# EAGLE board hammingparity (EAGLE 7.6.0)

Size 73.58 x 76.09 mm. Coordinates in mm from the lower left corner, seen from the top.
Outline: 0,0 56.82,0 56.82,53.33 0,53.33 0,0
Copper layers (1*16): Top 0.035mm / dielectric 1.5mm / Bottom 0.035mm
Design rules "default": minimum track width 10mil, minimum drill 24mil, track to track 8mil, track to pad 8mil, pad to pad 8mil, via to via 8mil, smd to smd 8mil, copper to edge 40mil, drill to drill 8mil, minimum pad ring 10mil, minimum via ring 8mil, stop-mask expansion 4mil, vias tented up to drill 0mil, thermal gap 10mil

## Footprints (pad centres in the part's own frame; a part is rotated, then mirrored left to right if it is on the bottom)
LED5MM = drill 0.813 octagon: A -1.27,0; K 1.27,0
0207/10 = drill 0.813 octagon: 1 -5.08,0; 2 5.08,0
TL1105 = drill 1 pad 1.676: 1 -2.25,3.25; 2 2.25,3.25; 3 -2.25,-3.25; 4 2.25,-3.25
ARDUINO_UNO = drill 1.016 pad 1.88: 0 63.5,50.8; 1 60.96,50.8; 2 58.42,50.8; 3 55.88,50.8; 3.3V 35.56,2.54; 4 53.34,50.8; 5 50.8,50.8; 5V 38.1,2.54; 6 48.26,50.8; 7 45.72,50.8; 8 41.656,50.8; 9 39.116,50.8; 10 36.576,50.8; 11 34.036,50.8; 12 31.496,50.8; 13 28.956,50.8; A0 50.8,2.54; A1 53.34,2.54; A2 55.88,2.54; A3 58.42,2.54; A4 60.96,2.54; A5 63.5,2.54; AREF 23.876,50.8; GND 26.416,50.8; GND. 43.18,2.54; GND.. 40.64,2.54; I/OREF 30.48,2.54; N/C 27.94,2.54; RESET 33.02,2.54; SCL 18.796,50.8; SDA 21.336,50.8; VIN 45.72,2.54 | hole 3.2: 66.04,7.62; 66.04,35.56; 15.24,50.8; 13.97,2.54
1X16P-2.54-2.54-11.6-3.0-BLACK-MALE = drill 0.889 pad 1.651 square: 1 0,19.05 | drill 0.889 pad 1.651: 2 0,16.51; 3 0,13.97; 4 0,11.43; 5 0,8.89; 6 0,6.35; 7 0,3.81; 8 0,1.27; 9 0,-1.27; 10 0,-3.81; 11 0,-6.35; 12 0,-8.89; 13 0,-11.43; 14 0,-13.97; 15 0,-16.51; 16 0,-19.05

## Placement (x,y rotation side)
DD3  [LED5MM]  5,187.88 0 top  (outside the outline)
DD5  [LED5MM]  5,238.68 0 top  (outside the outline)
DD6  [LED5MM]  5,264.08 0 top  (outside the outline)
DD7  [LED5MM]  5,289.48 0 top  (outside the outline)
DP1  [LED5MM]  5,314.88 0 top  (outside the outline)
DP2  [LED5MM]  5,162.48 0 top  (outside the outline)
DP4  [LED5MM]  5,213.28 0 top  (outside the outline)
R1  0.33k‎Ω  [0207/10]  5,10.08 0 top
R2  620‎Ω  [0207/10]  5,35.48 0 top
R3  1k‎Ω  [0207/10]  5,48.18 0 top
R4  3.3k‎Ω  [0207/10]  5,340.28 0 top  (outside the outline)
R5  2k‎Ω  [0207/10]  5,60.88 0 top
R6  0.22k‎Ω  [0207/10]  5,137.08 0 top  (outside the outline)
R7  330‎Ω  [0207/10]  5,149.78 0 top  (outside the outline)
R8  1k‎Ω  [0207/10]  5,175.18 0 top  (outside the outline)
R9  1k‎Ω  [0207/10]  5,200.58 0 top  (outside the outline)
R10  1k‎Ω  [0207/10]  5,225.98 0 top  (outside the outline)
R11  1k‎Ω  [0207/10]  5,251.38 0 top  (outside the outline)
R12  1k‎Ω  [0207/10]  5,276.78 0 top  (outside the outline)
R13  1k‎Ω  [0207/10]  5,302.18 0 top  (outside the outline)
SDOWN  [TL1105]  5,98.98 0 top  (outside the outline)
SLEFT  [TL1105]  5,111.68 0 top  (outside the outline)
SRIGHT  [TL1105]  5,73.58 0 top
SSELECT  [TL1105]  5,327.58 0 top  (outside the outline)
SUP  [TL1105]  5,86.28 0 top  (outside the outline)
U1  [ARDUINO_UNO]  5,22.78 0 top
U2  [1X16P-2.54-2.54-11.6-3.0-BLACK-MALE]  5,124.38 0 top  (outside the outline)

## Library data of the parts
DD3 DD5-DD7 DP1 DP2 DP4 R1-R13 SDOWN SLEFT SRIGHT SSELECT SUP U1 U2 = AUTODESK_CIRCUITS_BREADBOARD

## Nets
N$1: R1.2 R5.1 SRIGHT.2 U1.A0
N$2: R1.1 R2.2 SUP.2
N$3: R2.1 R3.2 SDOWN.2
N$4: SRIGHT.1 U1.GND..
N$5: U1.9 U2.6
N$6: U1.8 U2.4
N$7: U1.7 U2.14
N$8: U1.6 U2.13
N$9: U1.5 U2.12
N$10: U1.4 U2.11
N$11: U1.GND U2.1 U2.3 U2.5
N$12: R6.2 U2.16
N$13: SRIGHT.3 SUP.1
N$14: SDOWN.1 SUP.3
N$15: SDOWN.3 SLEFT.1
N$16: DD3.A DD5.A DD6.A DD7.A DP1.A DP2.A DP4.A R5.2 U1.5V U2.2 U2.15
N$17: R3.1 R4.2 SLEFT.2
N$18: R6.1 U1.GND.
N$19: R7.2 U1.13
N$20: DP2.K R8.1
N$21: R8.2 U1.12
N$22: DD3.K R9.1
N$23: R9.2 U1.11
N$24: DP4.K R10.1
N$25: R10.2 U1.10
N$26: DD5.K R11.1
N$27: DD6.K R12.1
N$28: DD7.K R13.1
N$29: R13.2 U1.A5
N$30: R12.2 U1.A4
N$31: R11.2 U1.A3
N$32: DP1.K R7.1
N$33: SLEFT.3 SSELECT.1
N$34: R4.1 SSELECT.2

## Tracks (layer width: path | path; a pad name or v marks a point on that pad's centre or on a via)
N$1  (3 unrouted)
N$2  (2 unrouted)
N$3  (2 unrouted)
N$4  (1 unrouted)
N$5  (1 unrouted)
N$6  (1 unrouted)
N$7  (1 unrouted)
N$8  (1 unrouted)
N$9  (1 unrouted)
N$10  (1 unrouted)
N$11  (3 unrouted)
N$12  (1 unrouted)
N$13  (1 unrouted)
N$14  (1 unrouted)
N$15  (1 unrouted)
N$16  (10 unrouted)
N$17  (2 unrouted)
N$18  (1 unrouted)
N$19  (1 unrouted)
N$20  (1 unrouted)
N$21  (1 unrouted)
N$22  (1 unrouted)
N$23  (1 unrouted)
N$24  (1 unrouted)
N$25  (1 unrouted)
N$26  (1 unrouted)
N$27  (1 unrouted)
N$28  (1 unrouted)
N$29  (1 unrouted)
N$30  (1 unrouted)
N$31  (1 unrouted)
N$32  (1 unrouted)
N$33  (1 unrouted)
N$34  (1 unrouted)